# EAGLE board Main_PCB_v.2 (EAGLE 8.4.1)
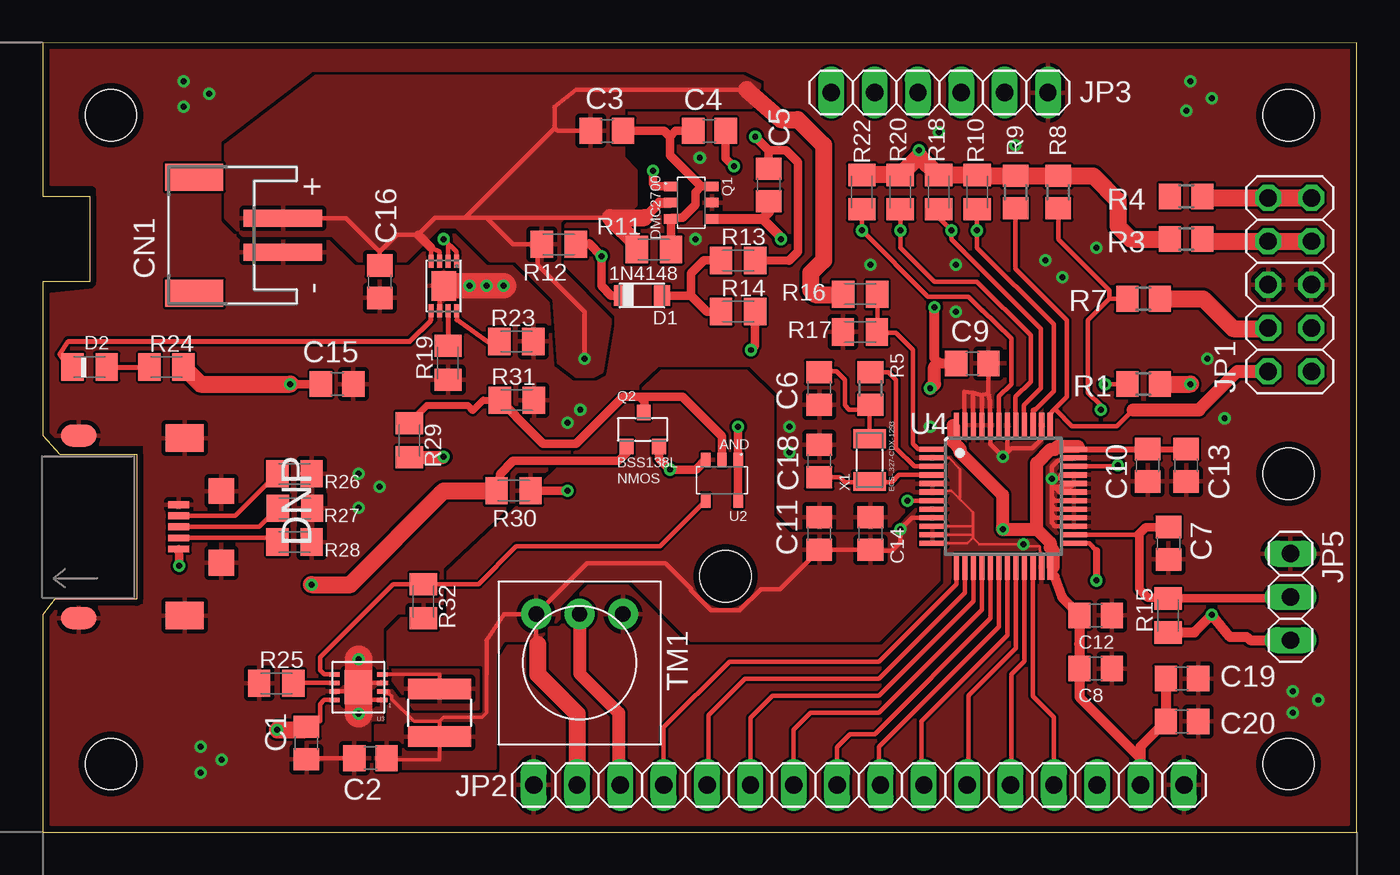
[diagram p0: board, top side]
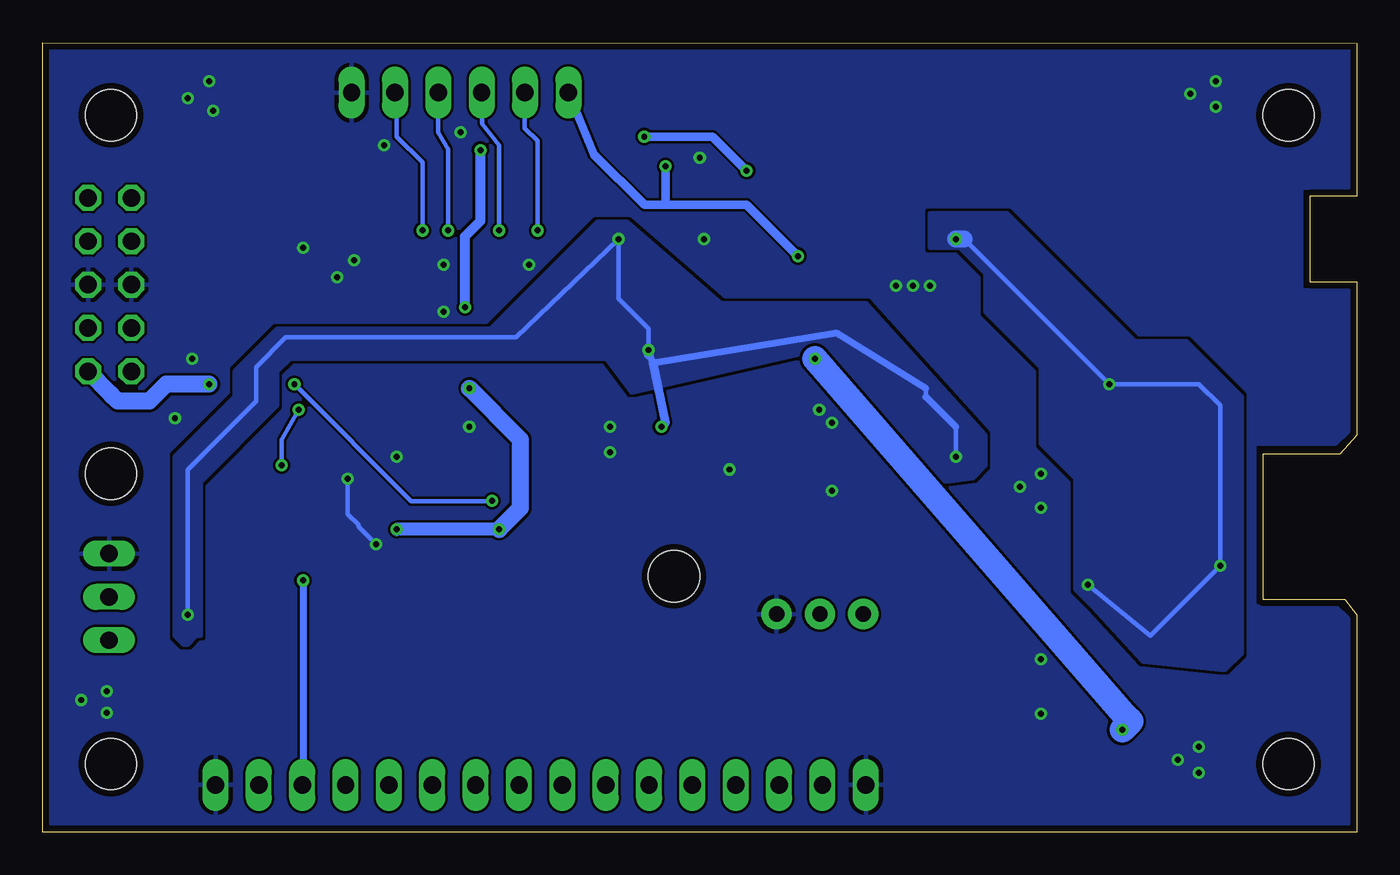
[diagram p1: board, bottom side, seen from below]

Size 77 x 46.25 mm. Coordinates in mm from the lower left corner, seen from the top.
Outline: 0,0 77,0 77,46.25 0,46.22 0,37.25 2.75,37.25 2.75,32.25 0,32.25 0,23.25 1,22.15 5.5,22.15 5.5,13.65 0.7,13.65 0,12.75 0,0
Copper layers (1*16): Top 0.0356mm / dielectric 1.5011mm / Bottom 0.0356mm
Design rules "LaenPCBOrder *": minimum track width 6mil, minimum drill 13mil, track to track 6mil, track to pad 6mil, pad to pad 6mil, via to via 6mil, smd to smd 6mil, copper to edge 15mil, drill to drill 6mil, minimum pad ring 7mil, minimum via ring 7mil, stop-mask expansion 3mil, vias tented up to drill 0mil, thermal gap 10mil
Holes 3 mm at 4,4 4,42 73,42 73,21 73,4 40,15

## Footprints (pad centres in the part's own frame; a part is rotated, then mirrored left to right if it is on the bottom)
C_0805 = smd 1.3 x 1.5: 1 -0.95,0; 2 0.95,0
JST-PH-2-SMT-RA = smd 1 x 4.6: 1 1,-3.7; 2 -1,-3.7 | smd 1.6 x 3.4: NC1 -3.4,1.5; NC2 3.4,1.5
UJ2-MIBH-4-MSMT-TR = smd 2.1 x 1.3: 6 0,5.35; 11 0,-5.35 | smd 2.2 x 1.6: 7 6.2,5.2; 10 6.2,-5.2 | smd 1.5 x 1.5: 8 8.35,2.1; 9 8.35,-2.1 | smd 1.25 x 0.4: GND 5.85,1.3; NC 5.85,0.65; RX 5.85,-0.65; TX 5.85,0; VCC 5.85,-1.3
D_SOD_123 = smd 0.914 x 1.219: 1 -1.181,0; 2 1.181,0
LED_0805 = smd 1.3 x 1.6: 1 -1,0; 2 1,0
2X05 = drill 1.016 octagon: 1 -5.08,-1.27; 2 -5.08,1.27; 3 -2.54,-1.27; 4 -2.54,1.27; 5 0,-1.27; 6 0,1.27; 7 2.54,-1.27; 8 2.54,1.27; 9 5.08,-1.27; 10 5.08,1.27
1X16 = drill 1.016 long: 1 -19.05,0; 2 -16.51,0; 3 -13.97,0; 4 -11.43,0; 5 -8.89,0; 6 -6.35,0; 7 -3.81,0; 8 -1.27,0; 9 1.27,0; 10 3.81,0; 11 6.35,0; 12 8.89,0; 13 11.43,0; 14 13.97,0; 15 16.51,0; 16 19.05,0
1X06 = drill 1.016 long: 1 -6.35,0; 2 -3.81,0; 3 -1.27,0; 4 1.27,0; 5 3.81,0; 6 6.35,0
1X03 = drill 1.016 long: 1 -2.54,0; 2 0,0; 3 2.54,0
NONSTANDARD_IND = smd 1.2 x 3.7: P$1 -1.4,0; P$2 1.4,0
SOT-23-6 = smd 0.55 x 0.8: 1 -0.95,-1.2; 2 0,-1.2; 3 0.95,-1.2; 4 0.95,1.2; 5 0,1.2; 6 -0.95,1.2
TO-236 = smd 0.8 x 0.9: 1 -0.95,-1; 2 0.95,-1; 3 0.05,1
R0805 = smd 1.3 x 1.5: 1 -0.95,0; 2 0.95,0
R_0805 = smd 1.3 x 1.6: 1 -1,0; 2 1,0
TRIM-3386 = drill 0.9 pad 1.778: 1 -2.54,-2.857; 2 0,-2.857; 3 2.54,-2.857
8-DFN-(2X3) = smd 1.45 x 1.75: GND 0,0 | smd 0.3 x 0.75: NC -0.25,1.45; PROG -0.75,1.45; STAT 0.75,1.45; VBATT 0.25,-1.45; VBATT2 0.75,-1.45; VDD -0.75,-1.45; VDD2 -0.25,-1.45; VSS 0.25,1.45
SOT-23-5 = smd 0.55 x 0.8: 1 -0.95,-1.2; 2 0,-1.2; 3 0.95,-1.2; 4 0.95,1.2; 5 -0.95,1.2
WSON = smd 0.6 x 0.25: EN 1.4,-0.75; FB -1.4,-0.75; MODE -1.4,-0.25; NC 1.4,-0.25; PGND -1.4,0.75; SGND 1.4,0.25; SW -1.4,0.25; VIN 1.4,0.75 | smd 1.6 x 2: P$1 0,0
LQFP48 = smd 1.5 x 0.3: 1 -4.15,2.75; 2 -4.15,2.25; 3 -4.15,1.75; 4 -4.15,1.25; 5 -4.15,0.75; 6 -4.15,0.25; 7 -4.15,-0.25; 8 -4.15,-0.75; 9 -4.15,-1.25; 10 -4.15,-1.75; 11 -4.15,-2.25; 12 -4.15,-2.75; 25 4.15,-2.75; 26 4.15,-2.25; 27 4.15,-1.75; 28 4.15,-1.25; 29 4.15,-0.75; 30 4.15,-0.25; 31 4.15,0.25; 32 4.15,0.75; 33 4.15,1.25; 34 4.15,1.75; 35 4.15,2.25; 36 4.15,2.75 | smd 0.3 x 1.5: 13 -2.75,-4.15; 14 -2.25,-4.15; 15 -1.75,-4.15; 16 -1.25,-4.15; 17 -0.75,-4.15; 18 -0.25,-4.15; 19 0.25,-4.15; 20 0.75,-4.15; 21 1.25,-4.15; 22 1.75,-4.15; 23 2.25,-4.15; 24 2.75,-4.15; 37 2.75,4.15; 38 2.25,4.15; 39 1.75,4.15; 40 1.25,4.15; 41 0.75,4.15; 42 0.25,4.15; 43 -0.25,4.15; 44 -0.75,4.15; 45 -1.25,4.15; 46 -1.75,4.15; 47 -2.25,4.15; 48 -2.75,4.15
CRYSTAL_OSC_3.2X1.5 = smd 1.1 x 1.9: P$1 1.25,0; P$2 -1.25,0

## Placement (x,y rotation side)
C1  4.7uF  [C_0805]  15.46,5.23 270 top
C2  10uF  [C_0805]  19.21,4.34 180 top
C3  100nF  [C_0805]  33.06,41.09 0 top
C4  1uF  [C_0805]  39.07,41.09 180 top
C5  4.7uF  [C_0805]  42.54,37.92 90 top
C6  22pF  [C_0805]  45.5,26 90 top
C7  4.7nF  [C_0805]  65.96,16.93 270 top
C8  100nF  [C_0805]  61.7,9.59 0 top
C9  100nF  [C_0805]  54.47,27.46 0 top
C10  100nF  [C_0805]  64.75,21.5 270 top
C11  10nF  [C_0805]  45.5,17.5 90 top
C12  4.7uF  [C_0805]  61.7,12.71 0 top
C13  4.7uF  [C_0805]  67,21.5 270 top
C14  1uF  [C_0805]  48.5,17.5 90 top
C15  4.7uF  [C_0805]  17.25,26.25 0 top
C16  4.7uF  [C_0805]  19.75,32.25 270 top
C18  22pF  [C_0805]  45.5,21.75 270 top
C19  1uF  [C_0805]  66.75,9 0 top
C20  100nF  [C_0805]  66.75,6.5 0 top
CN1  [JST-PH-2-SMT-RA]  10.38,34.97 90 top
CONN1  [UJ2-MIBH-4-MSMT-TR]  2.12,17.89 0 top
D1  1N4148_SOD_123  [D_SOD_123]  35.11,31.44 180 top
D2  [LED_0805]  2.75,27.25 180 top
JP1  [2X05]  73.07,32.08 90 top
JP2  [1X16]  47.82,2.78 0 top
JP3  [1X06]  52.55,43.33 180 top
JP5  [1X03]  73.11,13.79 270 top
L1  2.2 uH  [NONSTANDARD_IND]  23.25,7 90 top
Q1  DMC2700  [SOT-23-6]  38.01,36.88 270 top
Q2  [TO-236]  35.16,23.59 0 top
R1  0  [R0805]  64.5,26.25 0 top
R3  10k  [R0805]  67,34.75 180 top
R4  10k  [R0805]  67,37.25 180 top
R5  0  [R0805]  48.5,26 90 top
R7  22  [R0805]  64.5,31.25 0 top
R8  10k  [R0805]  59.5,37.5 90 top
R9  10k  [R0805]  57,37.5 90 top
R10  10k  [R_0805]  54.75,37.5 270 top
R11  100k  [R_0805]  35.81,34.14 180 top
R12  10k  [R_0805]  30.24,34.44 180 top
R13  330k  [R_0805]  40.75,33.5 0 top
R14  270k  [R_0805]  40.75,30.5 0 top
R15  10k  [R_0805]  65.94,12.7 90 top
R16  680k  [R_0805]  47.9,31.52 180 top
R17  1M  [R_0805]  47.89,29.31 0 top
R18  10k  [R_0805]  52.5,37.5 270 top
R19  DNP  [R_0805]  23.75,27.5 90 top
R20  10k  [R_0805]  50.25,37.5 270 top
R22  10k  [R_0805]  48,37.5 270 top
R23  2.2k  [R_0805]  27.75,28.75 180 top
R24  470  [R_0805]  7.25,27.25 0 top
R25  DNP  [R_0805]  13.69,8.73 0 top
R26  DNP  [R_0805]  14.75,21 180 top
R27  DNP  [R_0805]  14.78,18.98 180 top
R28  DNP  [R_0805]  14.75,17 180 top
R29  2.2k  [R_0805]  21.48,22.96 270 top
R30  10k  [R_0805]  27.59,20.01 0 top
R31  1M  [R_0805]  27.78,25.31 0 top
R32  10k  [R_0805]  22.31,13.53 270 top
TM1  10k  [TRIM-3386]  31.46,9.92 180 top
U1  [8-DFN-(2X3)]  23.5,32 180 top
U2  [SOT-23-5]  39.8,20.62 180 top
U3  LM3676  [WSON]  18.5,8.5 180 top
U4  STM32F072-LQFP48  [LQFP48]  56.28,19.68 0 top
X1  32.768kHz  [CRYSTAL_OSC_3.2X1.5]  48.45,21.8 90 top

## Library data of the parts
C1-C5 C7-C16 C19 C20 R10-R20 R22-R32 = 0805_generics
C6 C18 D1 D2 L1 X1 = LCRD_SMD_generics
CN1 TM1 = adafruit
CONN1 = USB_jack_102-4008-1-ND
JP1-JP3 JP5 = pinhead
Q1 Q2 U2 = DMC2700
R1 R3-R5 R7-R9 = rcl
U1 = mcp73831
U3 = LM3676
U4 = stm32f0

## Nets
+3V3: C2.1 C8.1 C9.1 C10.1 C11.1 C12.1 C13.1 C14.1 C19.1 C20.1 JP2.2 JP2.15 L1.P$1 R3.2 R8.2 R9.2 R10.1 R18.1 R20.1 R22.1 TM1.3 U3.SW U4.9 U4.24 U4.36 U4.48
+5V: R4.2
+V+_CHG: C15.1 CONN1.VCC Q2.1 R24.2 R30.1 U1.VDD U1.VDD2
BATT_CHG_LOGIC_OP: R32.1 U2.4 U3.EN
FL_RESET: R1.1 U4.7
FL_SWCLK: JP1.2 R9.1 U4.37
FL_SWDIO: R7.1 R8.1 U4.34
GND: C1.2 C2.2 C6.1 C7.2 C8.2 C9.2 C10.2 C11.2 C12.2 C13.2 C14.2 C15.2 C16.2 C18.1 C19.2 C20.2 CN1.2 CONN1.6 CONN1.7 CONN1.8 CONN1.9 CONN1.10 CONN1.11 CONN1.GND JP1.5 JP1.6 JP2.1 JP2.16 JP3.1 JP5.1 Q1.5 Q2.2 R17.1 R19.1 R23.1 R25.1 R26.1 R27.1 R28.1 R30.2 R31.2 R32.2 TM1.1 U1.GND U1.VSS U2.3 U3.MODE U3.P$1 U3.PGND U3.SGND U4.2 U4.5 U4.6 U4.8 U4.10 U4.11 U4.12 U4.23 U4.27 U4.28 U4.29 U4.30 U4.31 U4.32 U4.33 U4.35 U4.38 U4.42 U4.44 U4.45 U4.46 U4.47
LCD_4_RS: JP2.4 U4.13
LCD_5_R/W: JP2.5 U4.14
LCD_6_EN: JP2.6 U4.15
LCD_7_DB0: JP2.7 U4.16
LCD_8_DB1: JP2.8 U4.17
LCD_9_DB2: JP2.9 U4.18
LCD_10_DB3: JP2.10 U4.19
LCD_11_DB4: JP2.11 U4.20
LCD_12_DB5: JP2.12 U4.21
LCD_13_DB6: JP2.13 U4.22
LCD_14_DB7: JP2.14 U4.25
N$1: C5.2 Q1.1 R13.2
N$2: JP1.1 R1.2
N$3: JP1.9 JP1.10 R4.1
N$5: R5.2 U4.3
N$6: JP1.7 JP1.8 R3.1
N$7: R16.1 R17.2 U4.1
N$9: JP1.4 R7.2
N$10: L1.P$2 U3.FB
N$14: JP2.3 TM1.2
N$15: D1.1 R13.1 R14.1
N$28: Q2.3 R29.1 R31.1 U2.2
N$31: D2.2 U1.STAT
N$32: R19.2 U1.NC
N$33: D2.1 R24.1
N$34: R23.2 U1.PROG
N$35: R25.2 U3.NC
N$36: CONN1.NC R26.2
N$38: CONN1.TX R27.2
N$39: CONN1.RX R28.2
OSC32_IN: C6.2 R5.1 X1.P$1
OSC32_OUT: C18.2 U4.4 X1.P$2
PWR_SW: C4.1 D1.2 JP3.6 R12.1
Q1_D1: C3.2 C4.2 Q1.3 Q1.6 R11.1
SENSOR_SIG_OP: C7.1 JP5.2 R15.2 U4.26
SW_DOWN: JP3.3 R18.2 U4.40
SW_LEFT: JP3.5 R22.2 U4.43
SW_RIGHT: JP3.4 R20.2 U4.41
SW_UP: JP3.2 R10.2 U4.39
VBATT+: C1.1 C3.1 C16.1 CN1.1 Q1.2 R11.2 R12.2 R16.2 U1.VBATT U1.VBATT2 U3.VIN
VBATT+_SW: C5.1 JP5.3 Q1.4 R14.2 R15.1 R29.2 U2.1 U2.5

## Tracks (layer width: path | path; a pad name or v marks a point on that pad's centre or on a via)
+3V3  (via drill 0.35)
  Top 0.152: U4.24 59.21,15.53 | U4.48 53.35,23.83
  Top 0.2: 26,9.25 26,7 25.75,6.75 23.5,6.75 23.25,6.5 | 23.25,6.5 L1.P$1 23.25,4.25 20.25,4.25 C2.1 | U3.SW 20.02,8.13 20.31,8.13 20.45,7.98 20.45,7.8 21.75,6.5 23.25,6.5
  Top 0.203: 59,15.5 U4.24
  Top 0.25: U4.9 50.93,18.43 v50.25,17.75 50.25,17 49.75,16.5 48.55,16.5 C14.1 C11.1 43.2,14.25 42.09,14.25 40.83,12.99 39.17,12.99 38,14.17 38,14.26 36.5,15.75 31.89,15.75 TM1.3 | U4.24 59.28,14.97 | 59.06,22.43 59.25,22.43 U4.36 | 64.73,22.43 C10.1 | 64.33,4.32 JP2.15 | TM1.3 28.92,11.08 29,11 | 26,9.25 26,11.25 27.03,12.78 TM1.3 | 20.25,8.25 U3.SW
  Top 0.35: U4.36 64.73,22.43 | C10.1 C13.1
  Top 0.5: 52.25,27.25 52.53,27.46 | v51.36,39.96 51.36,39.6 | 52.46,38.5 R18.1 | R10.1 54.8,38.45
  Top 0.6: 59.28,14.97 59.73,13.77 C12.1 60.74,11.03 C8.1 60.75,7.92 64.33,4.32 | C9.1 52.53,27.46 52.25,27.74 v52.25,30.75 | JP2.15 64.33,5.03 C20.1 C19.1
  Top 0.75: v52,26 52.25,26.25 52.25,27.25 | 58.25,17.75 v56.25,17.75 56.25,19.75 53.75,22.25 53.75,22.46 53.35,22.86 53.35,23.83 | 58.25,17.75 58.25,21.63 59.06,22.43 | 59.21,15.53 59.21,16.5 59.03,16.68 59.03,16.97 58.25,17.75 | 60.69,22.61 59.46,22.61 59.29,22.43 59.25,22.43
  Top 1: 52.46,38.5 51.36,39.6 R20.1 R22.1 | R18.1 R10.1 | 54.8,38.45 R9.2 R8.2 61.55,38.45 63,37 63,35.5 63.75,34.75 R3.2 | 29,11 29,9.25 31.31,6.94 JP2.2
  Bottom 0.25: 52.25,34.91 52.26,34.92
  Bottom 0.5: v51.36,39.96 51.36,39.74 51.37,39.73
  Bottom 0.6: v52.25,30.75 52.25,34.91 51.37,35.8 51.37,39.73
  Bottom 0.75: v50.25,17.75 v56.25,17.75
  Bottom 1: v50.25,17.75 49,19 49,23 v52,26
  pour Top (rank 2): 36.25,27 23.75,15.25 23.75,12.75 23.5,12.5 21,12.5 20.25,11.75 20.25,6.25 19.5,6.25 19.5,3.75 26.5,3.75 26.5,10.5 27,11.25 29,11.25 30.25,12.5 30.25,13.25 31.75,14.75 34.5,14.75 38,11.25 49,11.25 52.5,14.75 52.5,19 51.25,19 49.75,17.5 43.75,17.5 42.75,18.5 42.75,25.5 41.25,27
+V+_CHG  (via drill 0.35)
  Top 0.25: U1.VDD2 23.75,34.5 v23.5,34.75 24.25,34 U1.VDD
  Top 0.5: v8,15.6 8.01,16.09 CONN1.VCC | v14.5,26.25 C15.1 | R30.1 26.74,20.46 26.79,20.98 27.56,21.75 33.75,21.75 34.21,22.21 Q2.1
  Top 1: v15.75,14.5 18,14.5 | 18,14.5 18.03,14.5 | 18,14.5 23.5,20 R30.1 | R24.2 9.25,26.25 v14.5,26.25
  Bottom 0.25: v15.75,14.5 12.1,11.5 v8,15.6 8,25 9.25,26.25 v14.5,26.25 23,34.75
  Bottom 1: 23,34.75 v23.5,34.75
  pour Bottom: 16.5,14.25 15.5,13.25 12.5,10 7.75,9.5 6.75,10.5 6.75,25.5 10,28.75 13,28.75 20.5,36.25 25,36.25 25,34.25 23.25,34.25 21.75,32.75 21.75,30.5 18.5,27.25 18.5,22.75 16.5,20.75
BATT_CHG_LOGIC_OP
  Top 0.25: U2.4 36.18,16.75 27.75,16.75 25.53,14.53 R32.1 20.53,14.53 16.25,10.25 16.25,9.5 16.5,9.25 U3.EN
FL_RESET  (via drill 0.35)
  Top 0.25: R1.1 v62.25,26.25 | v50.67,19.42 v50.68,19.43 U4.7
  Bottom 0.152: v50.67,19.42 v50.66,19.42 50.64,19.4
  Bottom 0.25: v62.25,26.25 55.4,19.4 50.64,19.4
FL_SWCLK
  Top 0.25: 59.25,24.75 60,25.5 60,30 57,33 R9.1 | 59.25,24.75 59,24.5 59,23.86 U4.37 | 59.25,24.75 59.36,24.75 60.31,23.79 62.93,23.78 63.89,24.75
  Top 0.75: 63.89,24.75 67.75,24.75 70,27 JP1.2
FL_SWDIO  (via drill 0.35)
  Top 0.25: R7.1 62.5,31.25 | 62.5,31.25 61.25,30 61.25,25.75 62,25 v62,24.75 | v63,21.5 62.68,21.43 U4.34 | 62.5,31.25 62.5,31.75 59.5,34.75 R8.1
  Bottom 0.25: v62,24.75 63,23 v63,21.5
GND  (via drill 0.35)
  Top 0.152: U4.23 58.53,16.22 58.5,16.25 58.5,16.35 58.43,16.43 58.43,16.72 58.4,16.75 57.57,16.75 v57.46,16.86 54.89,16.86 54.5,17.25 | 54.5,17.5 54.5,18 | 54.5,17.5 54.5,17.25 | 54.5,18 54.5,18.75 53.75,19.5 | 53.75,19.5 53.25,20 52.2,20 U4.6 | U4.2 53.09,21.93 53.75,21.27 53.75,19.5 | 59.48,21.77 59.55,21.77 59.59,21.81 60.31,21.81 U4.35 | U4.10 54.43,17.93 54.5,18 | U4.12 54.18,16.93 54.5,17.25 | U4.11 54.43,17.43 54.5,17.5 | 19.31,7.75 v18.5,6.94
  Top 0.25: U3.SGND 17.75,8.25 18,8.5 U3.P$1 | U3.MODE 19.25,8.75 19,8.5 U3.P$1 | U3.P$1 18.5,9.37 | U1.VSS 23.25,31.5 23.5,31.75 U1.GND | v59.13,20.71 59.13,21.42 59.48,21.77 | 54.5,25.75 54,25.8 54,25.25 U4.47 | 55.03,25.61 54.5,25.75 | 55.42,25.72 55.03,25.61 | 55.42,25.72 C9.2 | U4.46 54.53,24.33 54.5,24.36 54.5,25.75 | U4.45 55.03,24.72 55.03,25.61 | 55.42,25.72 55.5,25.28 55.5,24.5 55.53,24.47 U4.44 55.53,22.72 v56.25,22 | U4.42 56.53,22.28 v56.25,22 | U4.38 58.53,23.03 58,22.5 56.75,22.5 v56.25,22 | v59.13,20.71 59.47,20.71 59.69,20.93 U4.33 | v59.13,20.71 59.13,20.37 | U4.31 59.57,19.93 59.25,20.25 | 59.13,20.37 59.25,20.25 | 59.25,20.25 60.25,20.25 U4.32 | 59.13,20.37 59.13,19.62 | U4.30 59.32,19.43 59.13,19.62 | 59.13,19.62 59.13,19.12 | U4.29 59.32,18.93 59.13,19.12 | 59.13,19.12 59.13,18.62 | U4.28 59.32,18.43 59.13,18.62 | 59.13,18.62 59.13,18.12 59.32,17.93 U4.27 | C2.2 15.52,4.34 C1.2 | U3.PGND 19.31,7.75
  Top 0.5: U2.3 38.28,21.25 v36.75,21.25 36.11,21.89 Q2.2 | R30.2 v30.74,20.01 v30.75,20
  Top 1.5: U1.GND v25,32 v26,32 v27,32
  Top 1.6: v18.5,10.13 U3.P$1 v18.5,6.94
  Bottom 0.25: v57.46,16.86 58.5,17.9 58.5,18 59.13,18.63 v59.13,20.71
  other vias: 68.5,43 67.25,44 67,42.25 9.25,5 10.5,4.25 9.25,3.5 8.25,44 8.25,42.5 9.75,43.25 73.25,8.25 73.25,7 74.75,7.75 30.75,24 31.5,24.75 43.75,22.25 43.75,23.75 53.5,30.5 52,23.75 59.75,32.5 58.75,33.5 53.5,33.25 61.75,34.25 57,40.25 19.75,20.25 18.5,19 18.5,21 48.5,33.25 38.25,34.75 38.5,39.5 69.25,24.25 68.25,27.75 52.5,41
  pour Bottom (rank 3): 0.5,0.5 0.5,12.5 1.25,13.25 6,13.25 6,22.75 1.25,22.75 0.5,23.5 0.5,31.75 3.25,31.75 3.25,37.75 0.5,37.75 0.5,45.9 77,45.9 76.5,0.5
  pour Top (rank 3): 0.5,23.5 0.5,31.5 3,31.75 3.25,32 3.25,37.75 3,38 0.5,38 0.5,45.9 76.5,45.95 76.5,0.5 0.5,0.5 0.5,13 0.75,13.25 6,13.25 6,22.75 1.25,22.75
LCD_4_RS
  Top 0.25: U4.13 53.53,14.53 49,10 40.25,10 36.39,6.14 JP2.4
LCD_5_R/W
  Top 0.25: JP2.5 39,2.85 39,6.86 41.15,9 49,9 54.03,14.03 U4.14
LCD_6_EN
  Top 0.25: U4.15 54.53,13.53 49,8 42.75,8 41.47,6.72 JP2.6
LCD_7_DB0
  Top 0.25: U4.16 55.03,13.03 49,7 45,7 44,6 JP2.7
LCD_8_DB1
  Top 0.25: U4.17 55.53,12.53 48.75,5.75 47.31,5.75 46.56,5 46.55,4.95 JP2.8
LCD_9_DB2
  Top 0.25: U4.18 56.03,12.03 49,5 49,2.87 JP2.9
LCD_10_DB3
  Top 0.25: U4.19 56.53,11.53 51.5,6.5 51.5,2.91 JP2.10
LCD_11_DB4
  Top 0.25: U4.20 57.03,10.78 54.25,8 54.25,2.86 JP2.11
LCD_12_DB5
  Top 0.25: U4.21 57.53,10.03 56.75,9.25 56.75,2.82 JP2.12
LCD_13_DB6
  Top 0.25: U4.22 58.03,7.97 59.25,6.75 JP2.13
LCD_14_DB7  (via drill 0.35)
  Top 0.25: U4.25 61.32,16.93 61.75,16.5
  Top 0.4: 61.75,16.5 v61.75,14.75
  Bottom 0.25: 61.75,2.82 JP2.14
  Bottom 0.4: v61.75,14.75 61.75,2.82
N$1  (via drill 0.35)
  Top 0.5: Q1.1 35.92,37.83 35.75,38 v35.75,38.75 | C5.2 42.54,39.96 | v41.75,40.75 42.54,39.96 | 42.54,39.96 43.54,39.96 44.25,39.25 44.25,34 43.73,33.48 R13.2
  Bottom 0.5: v35.75,38.75 37.75,40.75 v41.75,40.75
N$2  (via drill 0.35)
  Top 1: R1.2 v67.25,26.25
  Bottom 1: v67.25,26.25 69.75,26.25 70.75,25.25 72.58,25.25 73,25.66 JP1.1
N$3
  Top 0.25: R4.1 68.04,37.16
  Top 1: 68.04,37.16 JP1.10 JP1.9
N$5
  Top 0.25: U4.3 51.07,21.43 50,22.5 50,26.5 49.55,26.95 R5.2
N$6
  Top 0.25: R3.1 68.08,34.62
  Top 1: 68.08,34.62 JP1.8 JP1.7
N$7
  Top 0.2: R17.2
  Top 0.25: R17.2 48.95,29.25 50,29.25 51,28.25 51,22.75 51.32,22.43 U4.1 | R16.1 R17.2
N$9
  Top 0.25: 71.76,29.5 JP1.4
  Top 1: R7.2 68,31.25 69.75,29.5 71.76,29.5
N$10
  Top 0.2: U3.FB 23.25,9.25 L1.P$2
  pour Top: 20,9.25 20.25,9.5 25.5,9.5 25.5,7.25 21.75,7.25 20.25,9.25
N$14
  Top 0.25: 33.75,2.88 JP2.3
  Top 0.75: TM1.2 31.46,9.29 33.75,7 33.75,2.88
N$15
  Top 0.5: R13.1 38.75,33.5 38,32.75 37.99,31.44 | 37.99,31.44 38.93,30.5 R14.1 | D1.1 37.99,31.44
N$28
  Top 0.4: R31.1 25.81,25.31 25.2,24.7 24.9,25 22.52,25 R29.1
  Top 0.5: R31.1 27.73,24.36 27.73,24.34 29.32,22.75 31.25,22.75 34,25.5 35,25.5 | 35,25.5 35.25,25.25 35.25,24.63 Q2.3 | 35,25.5 37.5,25.5 39.8,23.2 U2.2
N$31
  Top 0.2: D2.2 1.5,27.5 1.5,27.25
  Top 0.305: 1.5,27.25 1,28 1.5,28.75 21.5,28.75 22.75,30 U1.STAT
N$32
  Top 0.305: U1.NC R19.2
N$33
  Top 0.305: D2.1 R24.1
N$34
  Top 0.25: U1.PROG 24.27,30.02
  Top 0.305: R23.2 26.05,28.76 24.27,30.02
N$35
  Top 0.25: R25.2 14.71,8.75 U3.NC
N$36
  Top 0.25: CONN1.NC 11.29,18.54 R26.2
N$38
  Top 0.25: CONN1.TX 12.69,17.89 R27.2
N$39
  Top 0.25: CONN1.RX 11.74,17.24 | 11.74,17.24 11.75,17.25 | 11.74,17.24 13.51,17.24 R28.2
OSC32_IN
  Top 0.25: X1.P$1 48.45,25 R5.1 48.2,24.75 47.25,24.75 47,25 47,26.5 46.5,27 45.55,27 C6.2
OSC32_OUT
  Top 0.25: U4.4 50.18,20.93 49.75,20.5 48.5,20.5 | 48.5,20.5 X1.P$2 | C18.2 46.7,20.8 47,20.5 48.5,20.5
PWR_SW  (via drill 0.35)
  Top 0.5: D1.2 33.31,31.44 32.75,32 v32.75,33.75 32,34.5 31.94,34.44 R12.1 | v40.5,39 40.02,39.48 C4.1
  Bottom 0.5: v32.75,33.75 35.75,36.75 40.5,36.75 | 40.5,36.75 41.75,36.75 44.7,39.7 JP3.6 | v40.5,39 40.5,36.75
Q1_D1
  Top 0.4: 36.88,36 Q1.3
  Top 0.5: 36.88,36 37.5,36 38.25,36.75 38.25,37.5 38.58,37.83 | Q1.6 38.58,37.83 | 38.58,37.83 36.75,39.66 36.75,40.75 | 36.75,40.75 37.09,41.09 C4.2 | 36.75,40.75 36.41,41.09 C3.2 | Q1.3 R11.1
SENSOR_SIG_OP
  Top 0.25: U4.26 64.18,17.43
  Top 0.5: JP5.2 73.02,13.7 R15.2 65.89,13.75 64.75,13.75 64.25,14.25 64.25,17.5 | C7.1 64.63,17.88 64.25,17.5 | 64.18,17.43 64.25,17.5
SW_DOWN  (via drill 0.35)
  Top 0.25: R18.2 52.5,36 v53.25,35.25 53.25,34.75 58.5,29.5 58.5,26 57.5,25 57.5,23.86 U4.40
  Bottom 0.25: v53.25,35.25 53.25,40 53.83,41 53.83,42.45 JP3.3
SW_LEFT  (via drill 0.35)
  Top 0.25: U4.43 56.03,25.53 56.75,26.25 56.75,28.94 55.02,30.6 55.1,30.53 54.25,31.36 52.51,31.38 51.87,31.38 v48,35.25 R22.2
  Bottom 0.25: v48,35.25 48,40.5 48.75,41.25 JP3.5
SW_RIGHT  (via drill 0.35)
  Top 0.25: R20.2 v50.25,35.25 50.25,34.25 52.25,32.25 54.75,32.25 57.89,29.11 57.89,26.39 57,25.5 57,23.86 U4.41
  Bottom 0.25: v50.25,35.25 50.25,40.25 51.25,41.5 51.25,43.3 JP3.4
SW_UP  (via drill 0.35)
  Top 0.25: R10.2 v54.75,35.25 54.75,34.25 59.25,29.75 59.25,25.84 58.16,24.75 58.14,24.77 58.03,24.72 U4.39
  Bottom 0.25: JP3.2 56.25,43.22
  Bottom 0.254: v54.75,35.25 54.75,39.25 56.25,40.75 56.25,43.22 JP3.2
VBATT+  (via drill 0.35)
  Top 0.25: U1.VBATT2 22.75,34.25 23.25,34.01 U1.VBATT | C16.1 19.75,34 | 26,36 24.75,36 | 24.75,36 23,36 22,35 20.75,35 19.75,34 | 26,36 27.56,34.44 29,34.44 29,33.25 31.75,30.5 v31.75,27.75 | 26,36 33.25,36 | 30,41.25 24.75,36 | 30,41.25 30,42.5 31.25,43.5 41.25,43.5 | C3.1 30.16,41.09 30,41.25 | CN1.1 17.78,35.97 19.75,34 | U3.VIN 16.5,7.75 16.25,7.5 16.25,6.5 16.1,6.5 15.8,6.2 15.53,6.18 C1.1 15.28,6
  Top 0.5: 22,35 22.75,34.25 | 46.88,31.5 R16.2
  Top 0.6: Q1.2 36.14,36.88 35.25,36
  Top 1: 29,34.44 R12.2 | 35.25,36 33.25,36 34.81,34.44 R11.2 | 41.25,43.5 43.25,41.75 44.25,41.75 45.75,40.25 45.75,33.5 45,32.75 45,31.75 45.25,31.5 46.88,31.5 | v13.75,6 15.28,6
  Bottom 1.5: v31.75,27.75 13.5,6.75 13.25,6.5 v13.75,6
  pour Top: 10.75,36 11.75,35 17,35 18.5,33.5 21.25,33.5 23.25,35.5 24.25,35.5 26.25,33.5 27.75,33.5 30,31.25 30.25,27.5 31.25,26.75 32.25,26.75 32.75,27 33.25,30 30.25,33 30.25,35.75 30.5,36 34,36 34.75,36.75 34.75,38.75 34,39.5 34,42.5 41.5,42.5 42,43.75 41,44.25 16,44.25 10.75,40.25
VBATT+_SW  (via drill 0.35)
  Top 0.25: 43.25,34.86 v43.25,34.75 | 67.5,11.75 67.5,11.7 | 23.46,21.96 v23.5,22
  Top 0.5: v41.5,28.25 41.75,28.5 R14.2 | v40.75,23.75 U2.1 U2.5
  Top 0.6: Q1.4 42.18,35.93 | C5.1 42.54,36.29 42.18,35.93 | 42.18,35.93 43.25,34.86 | 67.5,11.7 R15.1 | JP5.3 70.75,11.25 70.55,11.45 69.56,11.45 v68.5,12.75 67.5,11.75
  Top 0.75: R29.2 23.46,21.96
  Bottom 0.25: v68.5,12.75 68.5,21.25 64.5,25.25 64.5,27.25 62.75,29 49.25,29 v43.25,34.75 43.25,31.25 41.5,29.5 v41.5,28.25 | 25.25,26 25.25,25.5 | 23.5,23.75 v23.5,22
  Bottom 0.406: 41.5,28 41.25,27.5 30.5,29.25 25.25,26 | 25.25,25.5 23.5,23.75
  Bottom 0.5: 41.25,27.5 40.5,24 v40.75,23.75
  Bottom 0.6: v41.5,28.25 41.5,28
  pour Bottom: 28.75,31 37.25,31 42.75,35.75 44.5,35.75 50.75,29.5 63.25,29.5 65.75,27 65.75,25.5 69.25,22 69.25,11.5 68.75,11 68.5,11 68,11.5 67.75,11.5 67.75,20.5 63.25,25 63.25,27 62.5,27.75 44,27.75 42.5,25.75 31.5,28.25 28,24 24.25,20.5 22.5,20.75 21.75,21.5 21.75,23.25

## Text on the board
tPlace: DNP